# Altium PCB vias.PcbDoc
Units mil, origin at the board's own origin, x right, y up, seen from the top; angles counter-clockwise.
Board outline 1574.8 x 984.25 mil, 6 copper layers (Top Layer, Internal Plane 1, Mid-Layer 2, Internal Plane 2, Mid-Layer 4, Bottom Layer), stack 60.63 mil thick; 4 components, 3 nets, 8 pads, 2 vias.
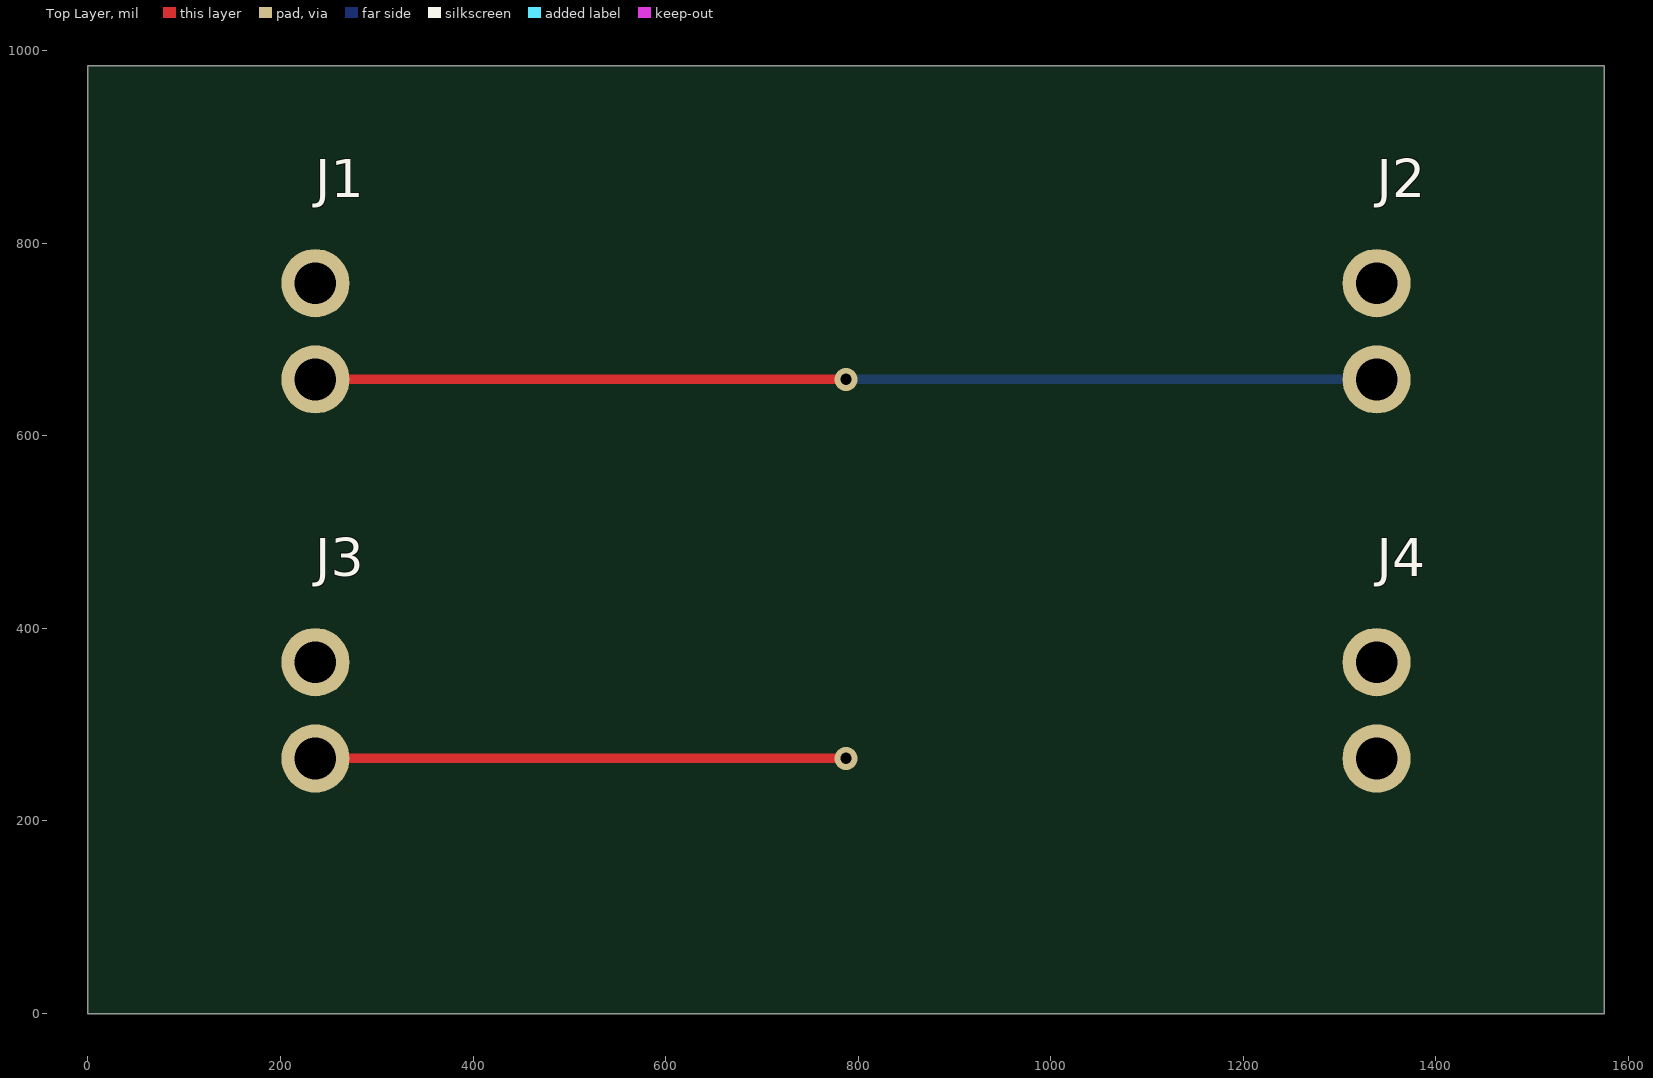
[diagram p0: Top Layer view]
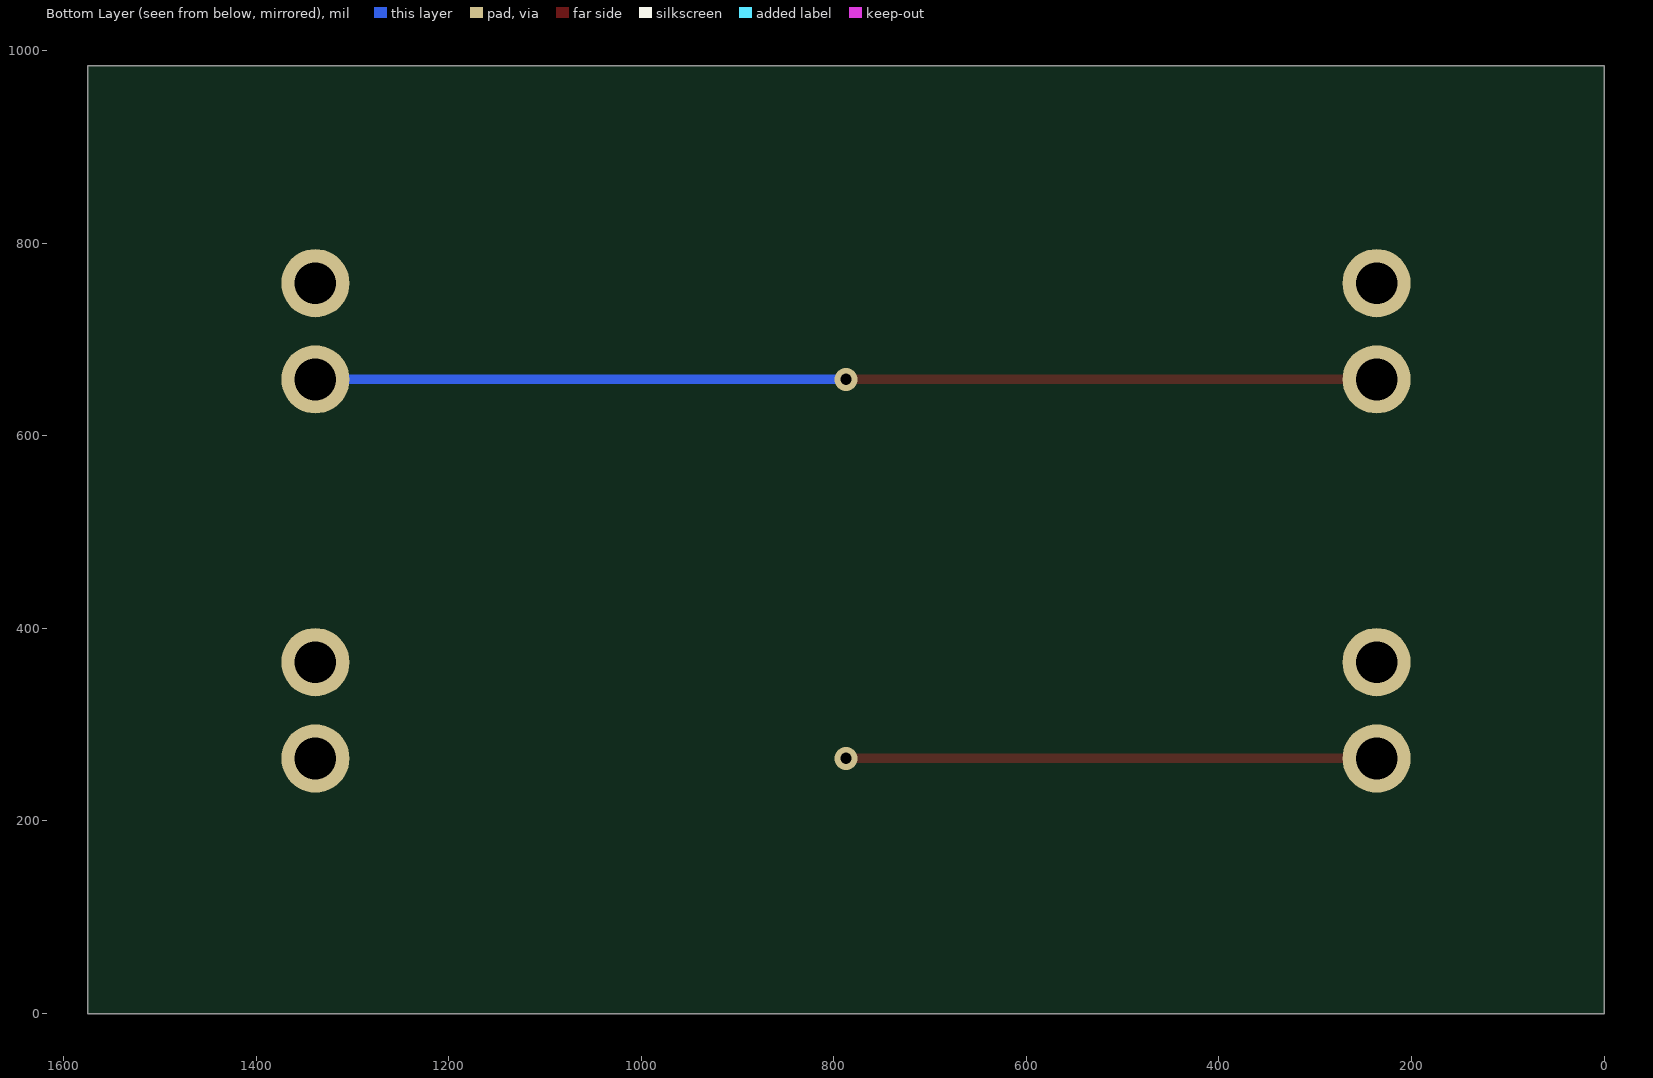
[diagram p1: Bottom Layer view, seen from below]
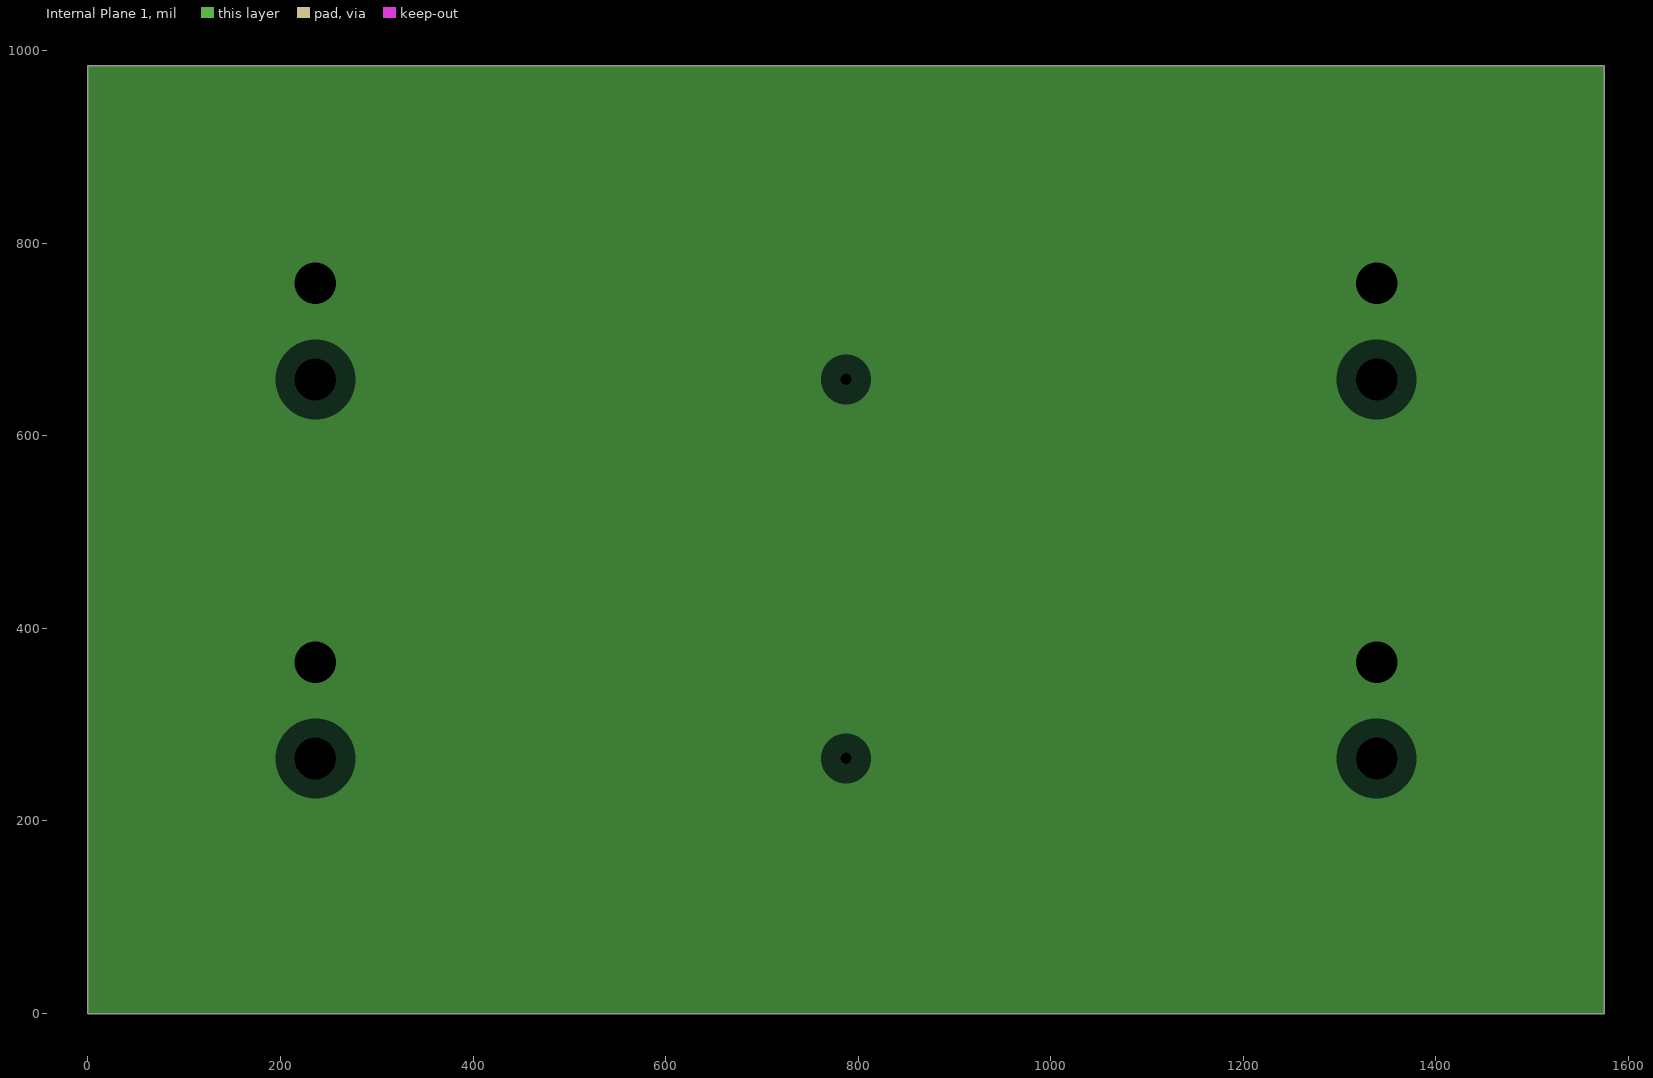
[diagram p2: Internal Plane 1, clearances drawn from the general rule]
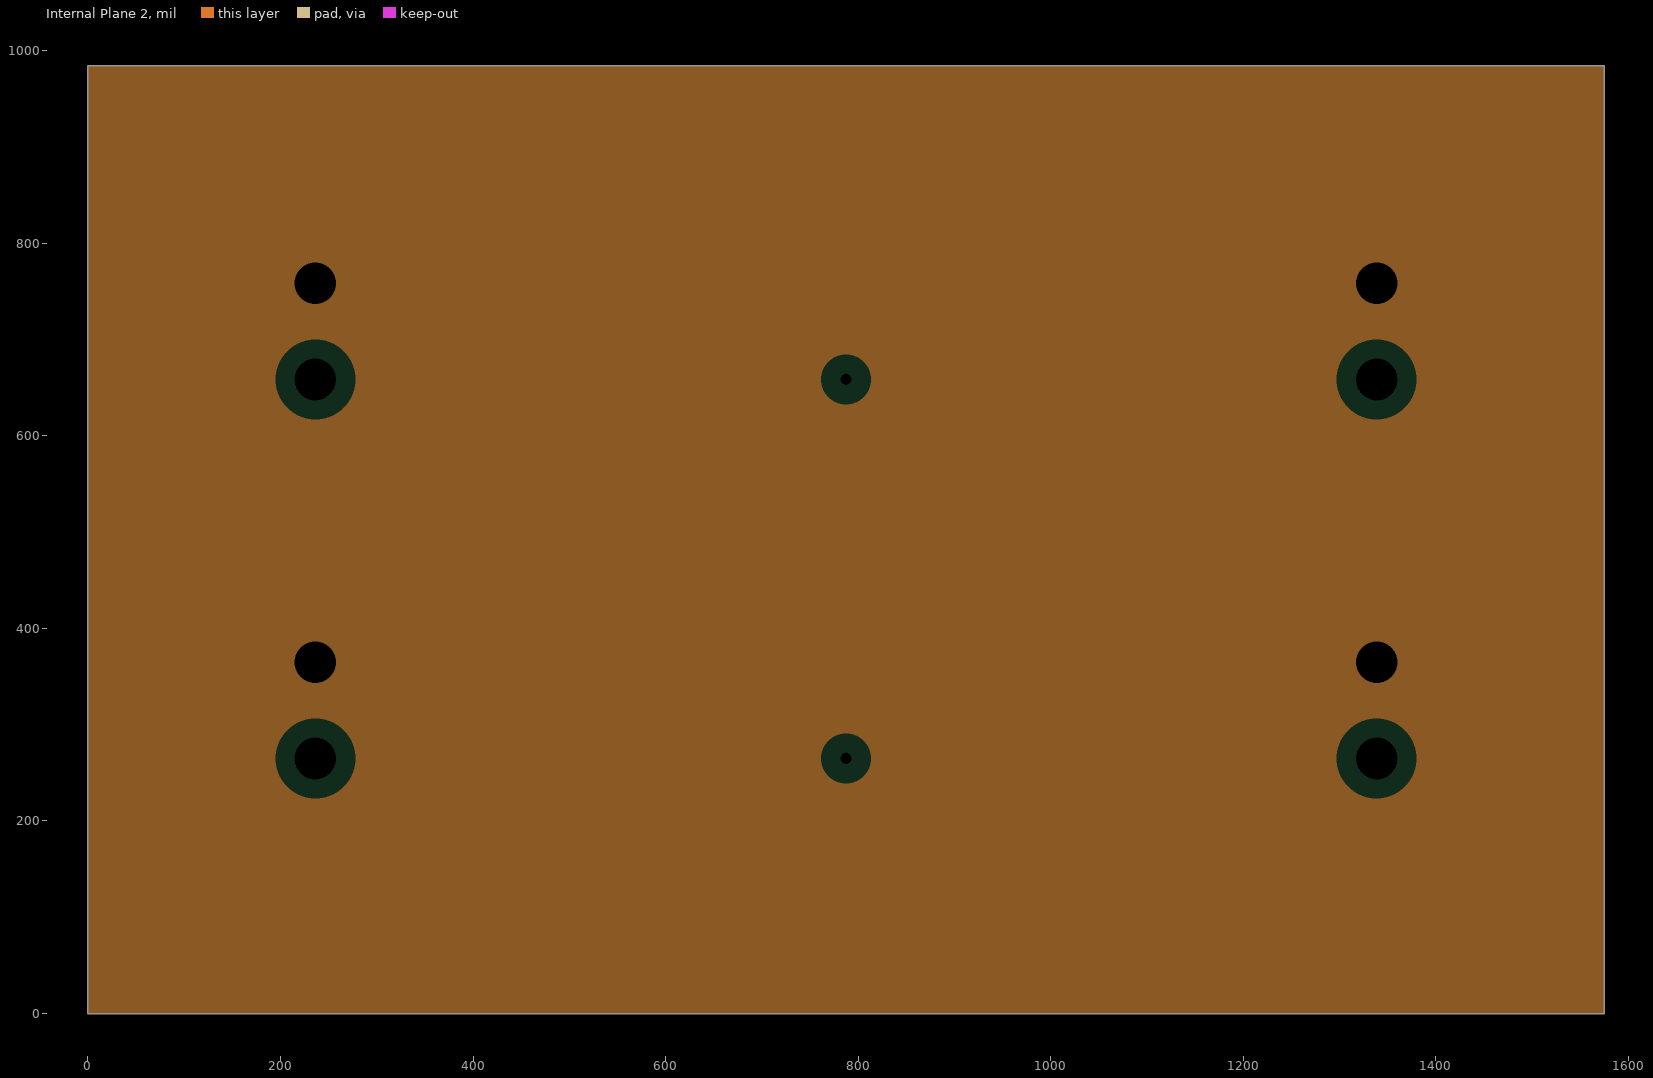
[diagram p3: Internal Plane 2, clearances drawn from the general rule]
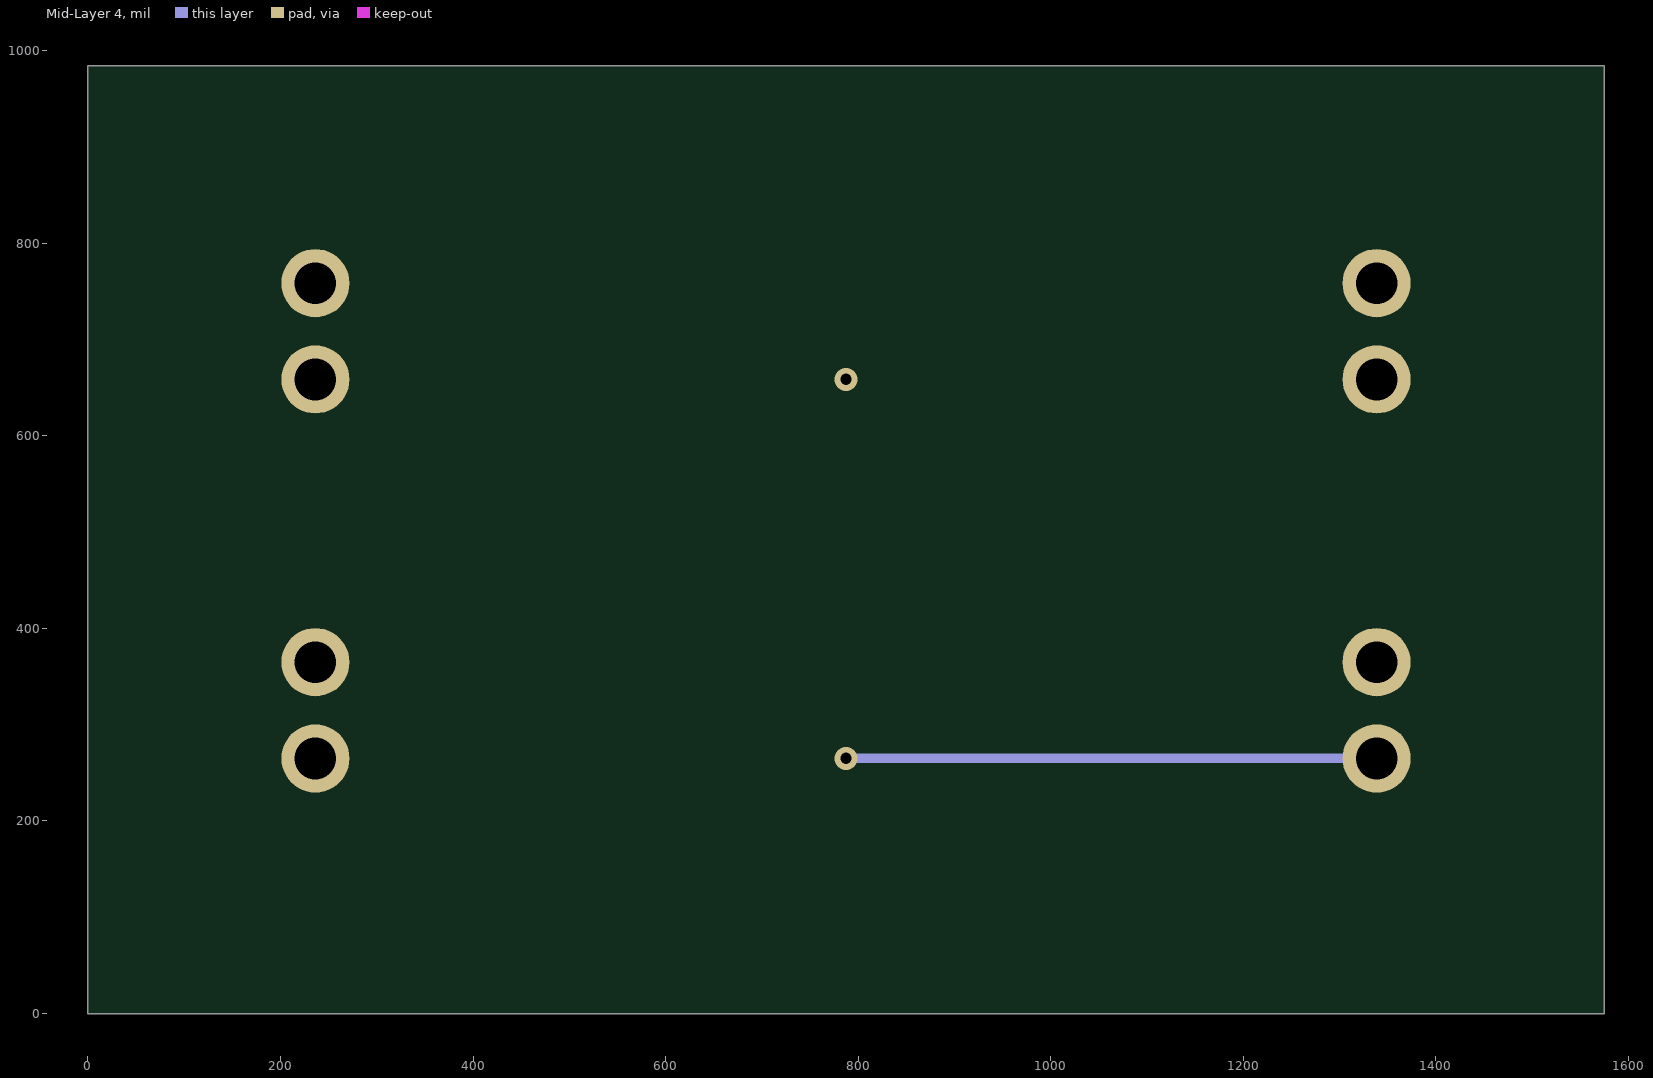
[diagram p4: Mid-Layer 4]

## Layer stack, top to bottom
Top Solder: solder mask 0.4, Solder Resist, Dk 3.5
Top Layer: signal copper 1.378
Dielectric 1: prepreg 7.874, FR-4, Dk 4.5
Internal Plane 1: plane copper 0.689, net GND
Dielectric 2: core 7.874, FR-4, Dk 4.5
Mid-Layer 2: signal copper 0.689
Dielectric 3: prepreg 23.622, FR-4, Dk 4.5
Internal Plane 2: plane copper 0.689, net GND
Dielectric 4: core 7.874, FR-4, Dk 4.5
Mid-Layer 4: signal copper 0.689
Dielectric 5: prepreg 7.874, FR-4, Dk 4.5
Bottom Layer: signal copper 1.378
Bottom Solder: solder mask 0.4, Solder Resist, Dk 3.5

## Board outline
0,984.25 1574.8,984.25 1574.8,0 0,0

## Design rules (kind name [scope] priority, off if disabled: settings)
Clearance [All] p1: gap=7.87 ignorepadtopadclearanceinfootprint=FALSE
RoutingVias [All] p1: holewidth=11.81 width=23.62 viastyle="Through Hole" minholewidth=11.81 minwidth=23.62 maxholewidth=11.81 maxwidth=23.62
Width [All] p1: maxlimit=9.84 minlimit=9.84 preferedwidth=9.84

## Components (designator, comment, footprint, x,y, rotation, side; value= is the part's Value field where it differs from the comment)
J1 "SIG_IN" Header_1x2_P2.54 236.22,708.66 r0 top
J2 "SIG_OUT" Header_1x2_P2.54 1338.58,708.66 r0 top
J3 "AUX_IN" Header_1x2_P2.54 236.22,314.96 r0 top
J4 "AUX_OUT" Header_1x2_P2.54 1338.58,314.96 r0 top

## Footprints (in the part's own frame and the unit in brackets; to place one, negate y for a bottom-side part, rotate by r counter-clockwise, add the part's x,y. Pads: shape width x height; smd on the part's side, far side on the other; paste and mask are expansions set on the pad)
Header_1x2_P2.54 [mm]
  round 1.8 hole 1.1: 1(0,-1.27) 2(0,1.27)

## Part data
J1 J2 J3 J4: library part Connector_2

## Via types
v1: diameter 23.62, hole 11.81, Top Layer to Bottom Layer, 2 vias

## Nets (pads, with @x,y where several pads share a name; then routed paths per layer and width w, separated by ;. In a path a pad name is that pad's centre, name@x,y a point inside that pad or via, vN(x,y) a via of type N, cw(c..) or ccw(c..) an arc to the next point about the centre after c; other vN are vias at no path point)
AUX: J3.1 J4.1 | length 1102.4
  Top Layer w9.84: J3.1 v1(787.4,264.96)
  Mid-Layer 4 w9.84: v1(787.4,264.96) J4.1
GND: J1.2 J2.2 J3.2 J4.2
SIG: J1.1 J2.1 | length 1102.4
  Top Layer w9.84: J1.1 v1(787.4,658.66)
  Bottom Layer w9.84: v1(787.4,658.66) J2.1